# EAGLE board relay_wired_panalized (EAGLE 7.7.0)
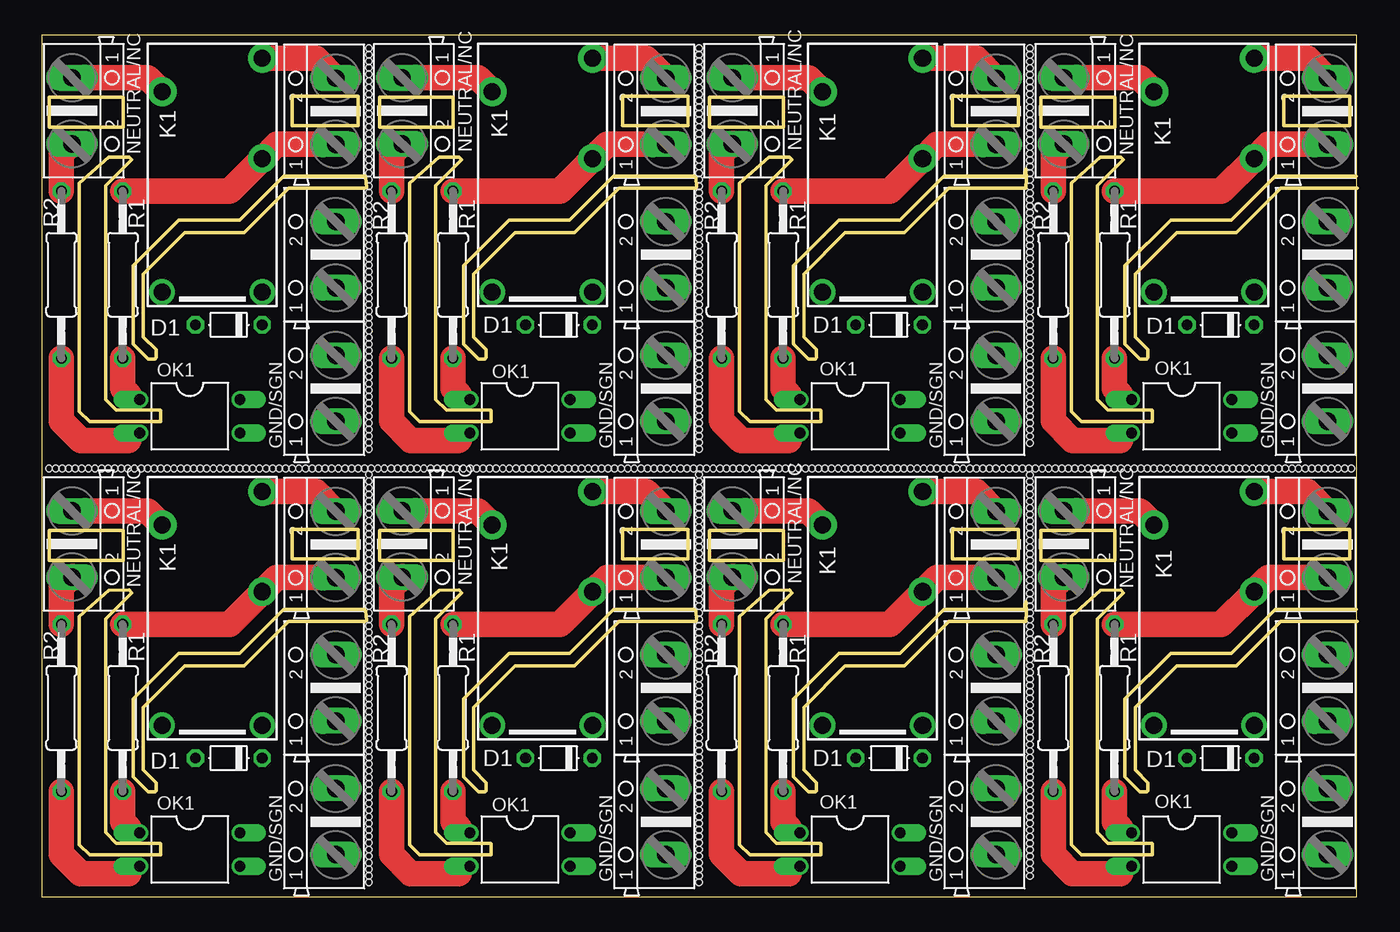
[diagram p0: board, top side]
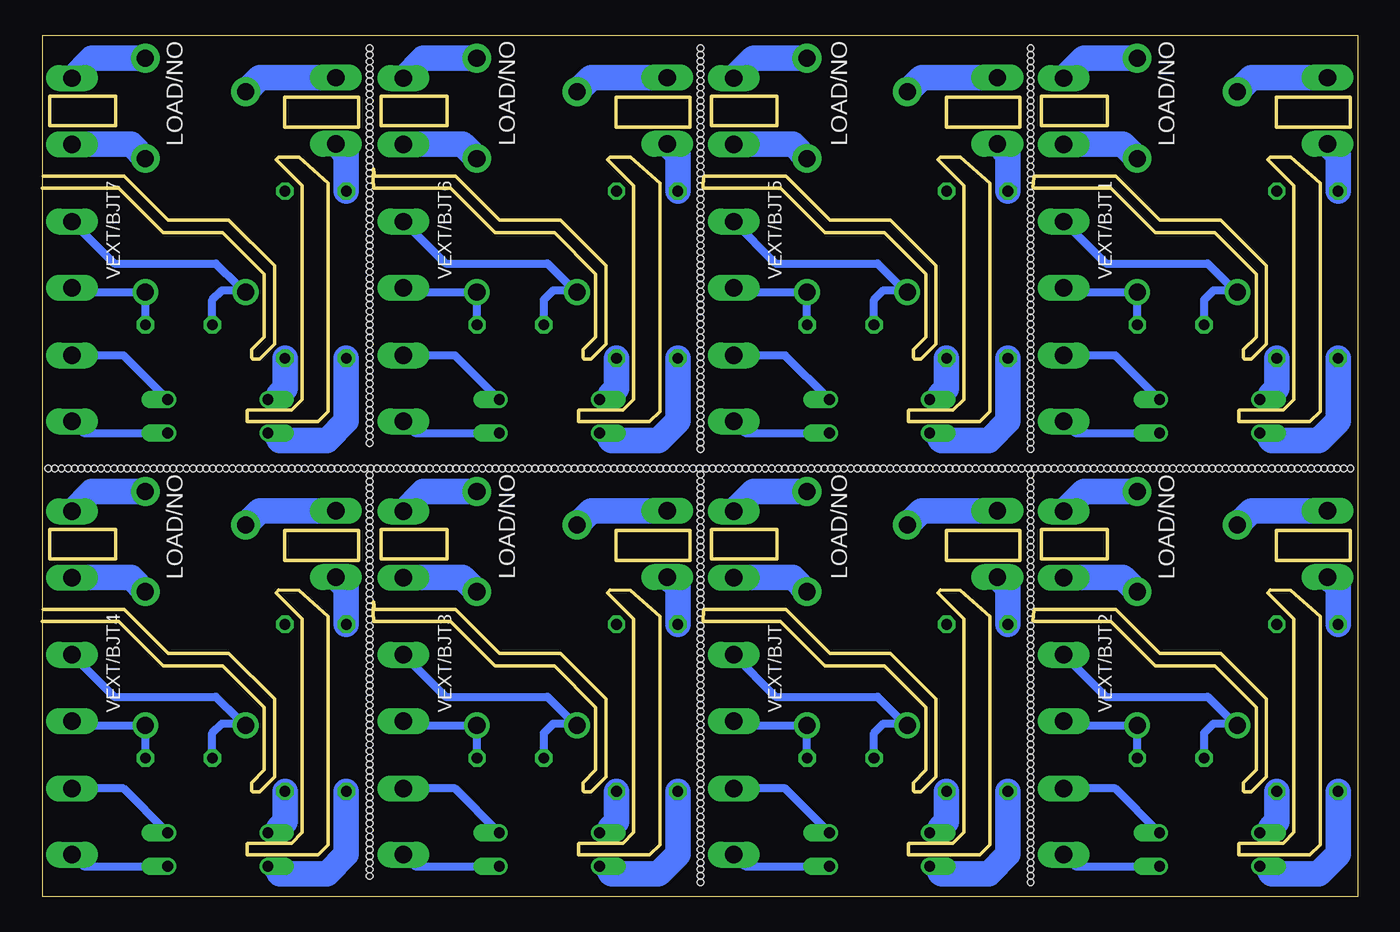
[diagram p1: board, bottom side, seen from below]

Size 100.01 x 65.5 mm. Coordinates in mm from the lower left corner, seen from the top.
Outline: 24.55,21.85 24.54,21.85
Outline: 24.54,21.85 18.39,21.85 15.04,18.5 10.43,18.5 6.97,15.04 6.97,9.1 8.11,7.96 8.62,7.96 8.7,8.04 8.7,8.67 7.74,9.63 7.74,14.4 10.89,17.55 15.41,17.55 18.79,20.93 24.61,20.93 24.69,21.01 24.65,21.74 24.54,21.85
Outline: 49.65,21.85 49.64,21.85
Outline: 49.64,21.85 43.49,21.85 40.14,18.5 35.53,18.5 32.07,15.04 32.07,9.1 33.21,7.96 33.72,7.96 33.8,8.04 33.8,8.67 32.84,9.63 32.84,14.4 35.99,17.55 40.51,17.55 43.89,20.93 49.71,20.93 49.79,21.01 49.75,21.74 49.64,21.85
Outline: 74.75,21.85 74.74,21.85
Outline: 74.74,21.85 68.59,21.85 65.24,18.5 60.63,18.5 57.17,15.04 57.17,9.1 58.31,7.96 58.82,7.96 58.9,8.04 58.9,8.67 57.94,9.63 57.94,14.4 61.09,17.55 65.61,17.55 68.99,20.93 74.81,20.93 74.87,21.67 74.83,22.4 74.74,21.85
Outline: 99.94,21.85 93.79,21.85 90.44,18.5 85.83,18.5 82.37,15.04 82.37,9.1 83.51,7.96 84.02,7.96 84.1,8.04 84.1,8.67 83.14,9.63 83.14,14.4 86.29,17.55 90.81,17.55 94.19,20.93 100.01,20.93
Outline: 24.55,54.79 24.54,54.79
Outline: 24.54,54.79 18.39,54.79 15.04,51.44 10.43,51.44 6.97,47.98 6.97,42.04 8.11,40.9 8.62,40.9 8.7,40.98 8.7,41.61 7.74,42.57 7.74,47.34 10.89,50.49 15.41,50.49 18.79,53.87 24.61,53.87 24.69,53.95 24.65,54.68 24.54,54.79
Outline: 49.65,54.79 49.64,54.79
Outline: 49.64,54.79 43.49,54.79 40.14,51.44 35.53,51.44 32.07,47.98 32.07,42.04 33.21,40.9 33.72,40.9 33.8,40.98 33.8,41.61 32.84,42.57 32.84,47.34 35.99,50.49 40.51,50.49 43.89,53.87 49.71,53.87 49.79,53.95 49.75,54.68 49.64,54.79
Outline: 74.75,54.79 74.74,54.79
Outline: 74.74,54.79 68.59,54.79 65.24,51.44 60.63,51.44 57.17,47.98 57.17,42.04 58.31,40.9 58.82,40.9 58.9,40.98 58.9,41.61 57.94,42.57 57.94,47.34 61.09,50.49 65.61,50.49 68.99,53.87 74.81,53.87 74.87,54.61 74.83,55.34 74.74,54.79
Outline: 99.94,54.79 93.79,54.79 90.44,51.44 85.83,51.44 82.37,47.98 82.37,42.04 83.51,40.9 84.02,40.9 84.1,40.98 84.1,41.61 83.14,42.57 83.14,47.34 86.29,50.49 90.81,50.49 94.19,53.87 100.01,53.87
Outline: 0,0 100,0 100,65.5 0,65.5 0,0
Outline: 0.58,27.86 0.58,25.58 6.2,25.57 6.2,27.85 0.58,27.86
Outline: 5.1,23.29 2.87,21.31 2.87,3.96 3.65,3.18 9.06,3.18 9.06,4.04 9.02,4.08 5.67,4.08 4.87,4.88 4.87,21.14 6.84,23.11 6.65,23.31 5.1,23.29
Outline: 19.05,27.91 24.05,27.91 24.05,25.68 19.05,25.68 19.05,27.91
Outline: 25.68,27.86 25.68,25.58 31.3,25.57 31.3,27.85 25.68,27.86
Outline: 30.2,23.29 27.97,21.31 27.97,3.96 28.75,3.18 34.16,3.18 34.16,4.04 34.12,4.08 30.77,4.08 29.97,4.88 29.97,21.14 31.94,23.11 31.75,23.31 30.2,23.29
Outline: 44.15,27.91 49.15,27.91 49.15,25.68 44.15,25.68 44.15,27.91
Outline: 50.78,27.86 50.78,25.58 56.4,25.57 56.4,27.85 50.78,27.86
Outline: 55.3,23.29 53.07,21.31 53.07,3.96 53.85,3.18 59.26,3.18 59.26,4.04 59.22,4.08 55.87,4.08 55.07,4.88 55.07,21.14 57.04,23.11 56.85,23.31 55.3,23.29
Outline: 69.25,27.91 74.25,27.91 74.25,25.68 69.25,25.68 69.25,27.91
Outline: 75.98,27.86 75.98,25.58 81.6,25.57 81.6,27.85 75.98,27.86
Outline: 80.5,23.29 78.27,21.31 78.27,3.96 79.05,3.18 84.46,3.18 84.46,4.04 84.42,4.08 81.07,4.08 80.27,4.88 80.27,21.14 82.24,23.11 82.05,23.31 80.5,23.29
Outline: 94.45,27.91 99.45,27.91 99.45,25.68 94.45,25.68 94.45,27.91
Outline: 0.58,60.8 0.58,58.52 6.2,58.51 6.2,60.79 0.58,60.8
Outline: 5.1,56.23 2.87,54.25 2.87,36.9 3.65,36.12 9.06,36.12 9.06,36.98 9.02,37.02 5.67,37.02 4.87,37.82 4.87,54.08 6.84,56.05 6.65,56.25 5.1,56.23
Outline: 19.05,60.85 24.05,60.85 24.05,58.62 19.05,58.62 19.05,60.85
Outline: 25.68,60.8 25.68,58.52 31.3,58.51 31.3,60.79 25.68,60.8
Outline: 30.2,56.23 27.97,54.25 27.97,36.9 28.75,36.12 34.16,36.12 34.16,36.98 34.12,37.02 30.77,37.02 29.97,37.82 29.97,54.08 31.94,56.05 31.75,56.25 30.2,56.23
Outline: 44.15,60.85 49.15,60.85 49.15,58.62 44.15,58.62 44.15,60.85
Outline: 50.78,60.8 50.78,58.52 56.4,58.51 56.4,60.79 50.78,60.8
Outline: 55.3,56.23 53.07,54.25 53.07,36.9 53.85,36.12 59.26,36.12 59.26,36.98 59.22,37.02 55.87,37.02 55.07,37.82 55.07,54.08 57.04,56.05 56.85,56.25 55.3,56.23
Outline: 69.25,60.85 74.25,60.85 74.25,58.62 69.25,58.62 69.25,60.85
Outline: 75.98,60.8 75.98,58.52 81.6,58.51 81.6,60.79 75.98,60.8
Outline: 80.5,56.23 78.27,54.25 78.27,36.9 79.05,36.12 84.46,36.12 84.46,36.98 84.42,37.02 81.07,37.02 80.27,37.82 80.27,54.08 82.24,56.05 82.05,56.25 80.5,56.23
Outline: 94.45,60.85 99.45,60.85 99.45,58.62 94.45,58.62 94.45,60.85
Copper layers (1*16): Top 0.035mm / dielectric 1.5mm / Bottom 0.035mm
Design rules "default": minimum track width 10mil, minimum drill 24mil, track to track 8mil, track to pad 8mil, pad to pad 8mil, via to via 8mil, smd to smd 8mil, copper to edge 40mil, drill to drill 8mil, minimum pad ring 10mil, minimum via ring 8mil, stop-mask expansion 4mil, vias tented up to drill 0mil, thermal gap 10mil
Holes 0.5 mm at 73.56,32.56 73.06,32.56 72.56,32.56 27.06,32.56 72.06,32.56 71.56,32.56 71.06,32.56 61.06,32.56 61.56,32.56 62.06,32.56 62.56,32.56 63.06,32.56 63.56,32.56 64.06,32.56 64.56,32.56 65.06,32.56 65.56,32.56 66.06,32.56 66.56,32.56 67.06,32.56 67.56,32.56 68.06,32.56 68.56,32.56 69.06,32.56 69.56,32.56 70.06,32.56 70.56,32.56 51.06,32.56 51.56,32.56 52.06,32.56 52.56,32.56 53.06,32.56 53.56,32.56 54.06,32.56 54.56,32.56 55.06,32.56 55.56,32.56 56.06,32.56 56.56,32.56 57.06,32.56 57.56,32.56 58.06,32.56 58.56,32.56 59.06,32.56 59.56,32.56 60.06,32.56 60.56,32.56 41.06,32.56 41.56,32.56 42.06,32.56 42.56,32.56 43.06,32.56 43.56,32.56 44.06,32.56 44.56,32.56 45.06,32.56 45.56,32.56 46.06,32.56 46.56,32.56 47.06,32.56 47.56,32.56 48.06,32.56 48.56,32.56 49.06,32.56 49.56,32.56 50.06,32.56 50.56,32.56 31.06,32.56 31.56,32.56 32.06,32.56 32.56,32.56 33.06,32.56 33.56,32.56 34.06,32.56 34.56,32.56 35.06,32.56 35.56,32.56 36.06,32.56 36.56,32.56 37.06,32.56 37.56,32.56 38.06,32.56 38.56,32.56 39.06,32.56 39.56,32.56 40.06,32.56 40.56,32.56 30.56,32.56 30.06,32.56 29.56,32.56 29.06,32.56 28.56,32.56 28.06,32.56 27.56,32.56 26.56,32.56 26.06,32.56 25.56,32.56 25.06,32.56 24.56,32.56 24.06,32.56 23.56,32.56 23.06,32.56 22.56,32.56 24.88,16.09 49.99,29.09 75.14,30.07 75.14,29.57 75.14,29.07 75.14,28.57 75.14,28.07 75.14,27.57 75.14,27.07 75.14,26.57 75.14,26.07 75.14,25.57 75.14,25.07 75.14,24.57 75.14,24.07 75.14,23.57 75.14,23.07 75.14,22.57 75.14,22.07 75.14,21.57 75.14,21.07 75.14,20.57 75.14,20.07 75.14,19.57 75.14,19.07 75.14,18.57 75.14,18.07 75.14,17.57 75.14,17.07 75.14,16.57 75.14,16.07 75.14,15.57 75.14,15.07 75.14,14.57 75.14,14.07 75.14,13.57 75.14,13.07 75.14,12.57 75.14,12.07 75.14,11.57 75.14,30.57 75.14,31.07 75.14,31.57 75.14,32.07 74.06,32.56 74.56,32.56 75.06,32.56 75.56,32.56 76.56,32.56 76.06,32.56 77.06,32.56 77.56,32.56 78.06,32.56 78.56,32.56 79.56,32.56 79.06,32.56 80.06,32.56 80.56,32.56 81.06,32.56 81.56,32.56 82.56,32.56 82.06,32.56 83.06,32.56 83.56,32.56 84.06,32.56 84.56,32.56 85.56,32.56 85.06,32.56 86.06,32.56 86.56,32.56 87.06,32.56 87.56,32.56 88.56,32.56 88.06,32.56 89.06,32.56 89.56,32.56 90.06,32.56 90.56,32.56 91.56,32.56 91.06,32.56 92.06,32.56 92.56,32.56 93.06,32.56 93.56,32.56 94.56,32.56 94.06,32.56 95.06,32.56 95.56,32.56 96.06,32.56 96.56,32.56 97.56,32.56 97.06,32.56 98.06,32.56 98.56,32.56 99.06,32.56 99.56,32.56 75.14,10.57 75.14,11.07 75.14,10.07 75.14,9.57 75.14,9.07 75.14,8.57 75.14,7.57 75.14,8.07 75.14,7.07 75.14,6.57 75.14,6.07 75.14,5.57 75.14,4.57 75.14,5.07 75.14,4.07 75.14,3.57 75.14,3.07 75.14,2.57 75.14,1.57 75.14,2.07 49.99,28.59 49.99,28.09 49.99,27.59 49.99,27.09 49.99,26.59 49.99,26.09 49.99,25.59 49.99,25.09 49.99,24.59 49.99,24.09 49.99,23.59 49.99,23.09 49.99,22.59 49.99,22.09 49.99,21.59 49.99,21.09 49.99,20.59 49.99,20.09 49.99,19.59 49.99,19.09 49.99,18.59 49.99,18.09 49.99,17.59 49.99,17.09 49.99,16.59 49.99,16.09 49.99,15.59 49.99,15.09 49.99,14.59 49.99,14.09 49.99,13.59 49.99,13.09 49.99,12.59 49.99,12.09 49.99,11.59 49.99,11.09 49.99,10.59 49.99,10.09 49.99,9.59 49.99,9.09 49.99,8.59 49.99,8.09 49.99,7.59 49.99,7.09 49.99,6.59 49.99,6.09 49.99,5.59 49.99,5.09 49.99,4.59 49.99,4.09 49.99,3.59 49.99,3.09 49.99,2.59 49.99,2.09 49.99,1.59 49.99,1.09 49.99,29.59 49.99,30.09 49.99,30.59 49.99,31.09 49.99,31.59 49.99,32.09 24.88,29.09 24.88,28.59 24.88,28.09 24.88,27.59 24.88,27.09 24.88,26.59 24.88,26.09 24.88,25.59 24.88,25.09 24.88,24.59 24.88,24.09 24.88,23.59 24.88,23.09 24.88,22.59 24.88,22.09 24.88,21.59 24.88,21.09 24.88,20.59 24.88,20.09 24.88,19.59 24.88,19.09 24.88,18.59 24.88,18.09 24.88,17.59 24.88,17.09 24.88,16.59 24.88,29.59 24.88,30.09 24.88,30.59 24.88,31.09 24.88,31.59 24.88,32.09 24.88,12.59 24.88,12.09 24.88,11.59 24.88,11.09 24.88,10.59 24.88,10.09 24.88,9.59 24.88,9.09 24.88,8.59 24.88,8.09 24.88,7.59 24.88,7.09 24.88,6.59 24.88,6.09 24.88,5.59 24.88,5.09 24.88,4.59 24.88,4.09 24.88,3.59 24.88,3.09 24.88,2.59 24.88,2.09 24.88,1.59 24.88,1.09 24.88,13.09 24.88,13.59 24.88,14.09 24.88,14.59 24.88,15.09 24.88,15.59 18.06,32.56 14.06,32.56 13.56,32.56 13.06,32.56 12.56,32.56 12.06,32.56 11.56,32.56 11.06,32.56 10.56,32.56 10.06,32.56 9.56,32.56 9.06,32.56 8.56,32.56 8.06,32.56 7.56,32.56 7.06,32.56 6.56,32.56 14.56,32.56 15.06,32.56 15.56,32.56 16.06,32.56 16.56,32.56 17.06,32.56 17.56,32.56 18.56,32.56 19.06,32.56 19.56,32.56 20.06,32.56 20.56,32.56 21.06,32.56 21.56,32.56 22.06,32.56 6.06,32.56 5.56,32.56 5.06,32.56 4.56,32.56 4.06,32.56 3.56,32.56 3.06,32.56 2.56,32.56 2.06,32.56 1.56,32.56 1.06,32.56 0.56,32.56 24.88,49.03 49.99,62.03 75.14,63.01 75.14,62.51 75.14,62.01 75.14,61.51 75.14,61.01 75.14,60.51 75.14,60.01 75.14,59.51 75.14,59.01 75.14,58.51 75.14,58.01 75.14,57.51 75.14,57.01 75.14,56.51 75.14,56.01 75.14,55.51 75.14,55.01 75.14,54.51 75.14,54.01 75.14,53.51 75.14,53.01 75.14,52.51 75.14,52.01 75.14,51.51 75.14,51.01 75.14,50.51 75.14,50.01 75.14,49.51 75.14,49.01 75.14,48.51 75.14,48.01 75.14,47.51 75.14,47.01 75.14,46.51 75.14,46.01 75.14,45.51 75.14,45.01 75.14,44.51 75.14,63.51 75.14,64.01 75.14,64.51 75.14,43.51 75.14,44.01 75.14,43.01 75.14,42.51 75.14,42.01 75.14,41.51 75.14,40.51 75.14,41.01 75.14,40.01 75.14,39.51 75.14,39.01 75.14,38.51 75.14,37.51 75.14,38.01 75.14,37.01 75.14,36.51 75.14,36.01 75.14,35.51 75.14,34.51 75.14,35.01 49.99,61.53 49.99,61.03 49.99,60.53 49.99,60.03 49.99,59.53 49.99,59.03 49.99,58.53 49.99,58.03 49.99,57.53 49.99,57.03 49.99,56.53 49.99,56.03 49.99,55.53 49.99,55.03 49.99,54.53 49.99,54.03 49.99,53.53 49.99,53.03 49.99,52.53 49.99,52.03 49.99,51.53 49.99,51.03 49.99,50.53 49.99,50.03 49.99,49.53 49.99,49.03 49.99,48.53 49.99,48.03 49.99,47.53 49.99,47.03 49.99,46.53 49.99,46.03 49.99,45.53 49.99,45.03 49.99,44.53 49.99,44.03 49.99,43.53 49.99,43.03 49.99,42.53 49.99,42.03 49.99,41.53 49.99,41.03 49.99,40.53 49.99,40.03 49.99,39.53 49.99,39.03 49.99,38.53 49.99,38.03 49.99,37.53 49.99,37.03 49.99,36.53 49.99,36.03 49.99,35.53 49.99,35.03 49.99,34.53 49.99,34.03 49.99,62.53 49.99,63.03 49.99,63.53 49.99,64.03 49.99,64.53 24.88,62.03 24.88,61.53 24.88,61.03 24.88,60.53 24.88,60.03 24.88,59.53 24.88,59.03 24.88,58.53 24.88,58.03 24.88,57.53 24.88,57.03 24.88,56.53 24.88,56.03 24.88,55.53 24.88,55.03 24.88,54.53 24.88,54.03 24.88,53.53 24.88,53.03 24.88,52.53 24.88,52.03 24.88,51.53 24.88,51.03 24.88,50.53 24.88,50.03 24.88,49.53 24.88,62.53 24.88,63.03 24.88,63.53 24.88,64.03 24.88,64.53 24.88,45.53 24.88,45.03 24.88,44.53 24.88,44.03 24.88,43.53 24.88,43.03 24.88,42.53 24.88,42.03 24.88,41.53 24.88,41.03 24.88,40.53 24.88,40.03 24.88,39.53 24.88,39.03 24.88,38.53 24.88,38.03 24.88,37.53 24.88,37.03 24.88,36.53 24.88,36.03 24.88,35.53 24.88,35.03 24.88,34.53 24.88,34.03 24.88,46.03 24.88,46.53 24.88,47.03 24.88,47.53 24.88,48.03 24.88,48.53

## Footprints (pad centres in the part's own frame; a part is rotated, then mirrored left to right if it is on the bottom)
D-5 = drill 0.813 octagon: A 2.54,0; C -2.54,0
AK500/2 = drill 1.321 long: 1 -2.515,0; 2 2.515,0
G5SB = drill 1.3 pad 1.93: 1 7.62,3.81; 5 7.62,-3.81 | drill 1.3 pad 2.184: 2 -2.54,3.81; 3 -10.16,3.81; 4 -7.62,-3.81
DIL04 = drill 0.813 offset: 1 -1.27,-3.81; 2 1.27,-3.81; 3 1.27,3.81; 4 -1.27,3.81
0207/12 = drill 0.813 octagon: 1 -6.35,0; 2 6.35,0

## Placement (x,y rotation side)
D1  1N4007  [D-5]  39.33,10.54 180 top
D2  1N4007  [D-5]  64.43,10.54 180 top
D3  1N4007  [D-5]  14.23,10.54 180 top
D4  1N4007  [D-5]  89.63,10.54 180 top
D5  1N4007  [D-5]  14.23,43.48 180 top
D6  1N4007  [D-5]  39.33,43.48 180 top
D7  1N4007  [D-5]  64.43,43.48 180 top
D8  1N4007  [D-5]  89.63,43.48 180 top
GND/S1  [AK500/2]  47.46,5.71 90 top
GND/S2  [AK500/2]  22.36,5.71 90 top
GND/S3  [AK500/2]  72.56,5.71 90 top
GND/S4  [AK500/2]  97.76,5.71 90 top
GND/S5  [AK500/2]  22.36,38.65 90 top
GND/S6  [AK500/2]  47.46,38.65 90 top
GND/S7  [AK500/2]  72.56,38.65 90 top
GND/S8  [AK500/2]  97.76,38.65 90 top
K1  G5Q-1-EU DC12  [G5SB]  38.07,20.65 270 top
K2  G5Q-1-EU DC12  [G5SB]  63.17,20.65 270 top
K3  G5Q-1-EU DC12  [G5SB]  12.97,20.65 270 top
K4  G5Q-1-EU DC12  [G5SB]  88.37,20.65 270 top
K5  G5Q-1-EU DC12  [G5SB]  12.97,53.59 270 top
K6  G5Q-1-EU DC12  [G5SB]  38.07,53.59 270 top
K7  G5Q-1-EU DC12  [G5SB]  63.17,53.59 270 top
K8  G5Q-1-EU DC12  [G5SB]  88.37,53.59 270 top
LOAD/NO1  [AK500/2]  47.46,26.79 90 top
LOAD/NO2  [AK500/2]  22.36,26.79 90 top
LOAD/NO3  [AK500/2]  72.56,26.79 90 top
LOAD/NO4  [AK500/2]  97.76,26.79 90 top
LOAD/NO5  [AK500/2]  22.36,59.73 90 top
LOAD/NO6  [AK500/2]  47.46,59.73 90 top
LOAD/NO7  [AK500/2]  72.56,59.73 90 top
LOAD/NO8  [AK500/2]  97.76,59.73 90 top
NEUTRAL/NC  [AK500/2]  52.51,26.82 270 top
NEUTRAL/NC1  [AK500/2]  27.41,26.82 270 top
NEUTRAL/NC2  [AK500/2]  2.31,26.82 270 top
NEUTRAL/NC3  [AK500/2]  2.31,59.76 270 top
NEUTRAL/NC4  [AK500/2]  77.71,26.82 270 top
NEUTRAL/NC5  [AK500/2]  27.41,59.76 270 top
NEUTRAL/NC6  [AK500/2]  52.51,59.76 270 top
NEUTRAL/NC7  [AK500/2]  77.71,59.76 270 top
OK1  SFH620A  [DIL04]  36.37,3.59 270 top
OK2  SFH620A  [DIL04]  61.47,3.59 270 top
OK3  SFH620A  [DIL04]  11.27,3.59 270 top
OK4  SFH620A  [DIL04]  86.67,3.59 270 top
OK5  SFH620A  [DIL04]  11.27,36.53 270 top
OK6  SFH620A  [DIL04]  36.37,36.53 270 top
OK7  SFH620A  [DIL04]  61.47,36.53 270 top
OK8  SFH620A  [DIL04]  86.67,36.53 270 top
R1  22k/2W  [0207/12]  31.27,14.36 270 top
R2  22k/2W  [0207/12]  26.6,14.36 270 top
R3  22k/2W  [0207/12]  56.37,14.36 270 top
R4  22k/2W  [0207/12]  51.7,14.36 270 top
R5  22k/2W  [0207/12]  6.17,14.36 270 top
R6  22k/2W  [0207/12]  1.5,14.36 270 top
R7  22k/2W  [0207/12]  81.56,14.36 270 top
R8  22k/2W  [0207/12]  76.9,14.36 270 top
R9  22k/2W  [0207/12]  6.17,47.3 270 top
R10  22k/2W  [0207/12]  1.5,47.3 270 top
R11  22k/2W  [0207/12]  31.27,47.3 270 top
R12  22k/2W  [0207/12]  26.6,47.3 270 top
R13  22k/2W  [0207/12]  56.37,47.3 270 top
R14  22k/2W  [0207/12]  51.7,47.3 270 top
R15  22k/2W  [0207/12]  81.56,47.3 270 top
R16  22k/2W  [0207/12]  76.9,47.3 270 top
VEXT/BJT  [AK500/2]  47.46,15.88 90 top
VEXT/BJT1  [AK500/2]  22.36,48.82 90 top
VEXT/BJT2  [AK500/2]  22.36,15.88 90 top
VEXT/BJT3  [AK500/2]  72.56,15.88 90 top
VEXT/BJT4  [AK500/2]  97.76,15.88 90 top
VEXT/BJT5  [AK500/2]  47.46,48.82 90 top
VEXT/BJT6  [AK500/2]  72.56,48.82 90 top
VEXT/BJT7  [AK500/2]  97.76,48.82 90 top

## Library data of the parts
D1-D8 = diode
GND/S1-GND/S8 LOAD/NO1-LOAD/NO8 NEUTRAL/NC NEUTRAL/NC1-NEUTRAL/NC7 VEXT/BJT VEXT/BJT1-VEXT/BJT7 = con-ptr500-modified; OC_FARNELL: unknown; OC_NEWARK: unknown
K1-K8 = relay; OC_FARNELL: unknown; OC_NEWARK: unknown
OK1-OK8 = optocoupler; MPN: SFH620A-2; OC_FARNELL: 1469594; OC_NEWARK: 97K9546
R1-R16 = rcl

## Nets
N$1: K5.2 LOAD/NO5.1 R9.1
N$2: NEUTRAL/NC3.2 R10.1
N$3: K5.4 NEUTRAL/NC3.1
N$4: OK5.2 R10.2
N$5: K3.2 LOAD/NO2.1 R5.1
N$6: NEUTRAL/NC2.2 R6.1
N$7: K3.4 NEUTRAL/NC2.1
N$8: OK3.2 R6.2
N$9: OK5.1 R9.2
N$10: D5.C K5.1 VEXT/BJT1.1
N$11: D5.A K5.5 VEXT/BJT1.2
N$12: D3.C K3.1 VEXT/BJT2.1
N$13: K5.3 LOAD/NO5.2
N$14: GND/S5.2 OK5.4
N$15: GND/S5.1 OK5.3
N$16: K6.2 LOAD/NO6.1 R11.1
N$17: NEUTRAL/NC5.2 R12.1
N$18: K6.4 NEUTRAL/NC5.1
N$19: OK6.2 R12.2
N$20: OK6.1 R11.2
N$21: D6.C K6.1 VEXT/BJT5.1
N$22: D6.A K6.5 VEXT/BJT5.2
N$23: K6.3 LOAD/NO6.2
N$24: GND/S6.2 OK6.4
N$25: OK3.1 R5.2
N$26: GND/S6.1 OK6.3
N$27: K7.2 LOAD/NO7.1 R13.1
N$28: NEUTRAL/NC6.2 R14.1
N$29: K7.4 NEUTRAL/NC6.1
N$30: D3.A K3.5 VEXT/BJT2.2
N$31: K3.3 LOAD/NO2.2
N$32: GND/S2.2 OK3.4
N$33: GND/S2.1 OK3.3
N$34: K1.2 LOAD/NO1.1 R1.1
N$35: NEUTRAL/NC1.2 R2.1
N$36: K1.4 NEUTRAL/NC1.1
N$37: OK1.2 R2.2
N$38: OK1.1 R1.2
N$39: D1.C K1.1 VEXT/BJT.1
N$40: D1.A K1.5 VEXT/BJT.2
N$41: K1.3 LOAD/NO1.2
N$42: GND/S1.2 OK1.4
N$43: GND/S1.1 OK1.3
N$44: K2.2 LOAD/NO3.1 R3.1
N$45: NEUTRAL/NC.2 R4.1
N$46: K2.4 NEUTRAL/NC.1
N$47: OK2.2 R4.2
N$48: OK2.1 R3.2
N$49: D2.C K2.1 VEXT/BJT3.1
N$50: D2.A K2.5 VEXT/BJT3.2
N$51: K2.3 LOAD/NO3.2
N$52: GND/S3.2 OK2.4
N$53: GND/S3.1 OK2.3
N$54: K4.2 LOAD/NO4.1 R7.1
N$55: NEUTRAL/NC4.2 R8.1
N$56: K4.4 NEUTRAL/NC4.1
N$57: OK4.2 R8.2
N$58: OK4.1 R7.2
N$59: D4.C K4.1 VEXT/BJT4.1
N$60: D4.A K4.5 VEXT/BJT4.2
N$61: K4.3 LOAD/NO4.2
N$62: GND/S4.2 OK4.4
N$63: GND/S4.1 OK4.3
N$64: OK7.2 R14.2
N$65: OK7.1 R13.2
N$66: D7.C K7.1 VEXT/BJT6.1
N$67: D7.A K7.5 VEXT/BJT6.2
N$68: K7.3 LOAD/NO7.2
N$69: GND/S7.2 OK7.4
N$70: GND/S7.1 OK7.3
N$71: K8.2 LOAD/NO8.1 R15.1
N$72: NEUTRAL/NC7.2 R16.1
N$73: K8.4 NEUTRAL/NC7.1
N$74: OK8.2 R16.2
N$75: OK8.1 R15.2
N$76: D8.C K8.1 VEXT/BJT7.1
N$77: D8.A K8.5 VEXT/BJT7.2
N$78: K8.3 LOAD/NO8.2
N$79: GND/S8.2 OK8.4
N$80: GND/S8.1 OK8.3

## Tracks (layer width: path | path; a pad name or v marks a point on that pad's centre or on a via)
N$1
  Top 1.93: LOAD/NO5.1 17.87,57.21 16.91,56.25 | R9.1 14.3,53.65 K5.2
  Bottom 1.93: LOAD/NO5.1 17.86,57.21 K5.2
N$2
  Top 1.93: R10.1 1.5,56.44 2.36,57.3
  Bottom 1.93: R10.1 1.5,56.44 NEUTRAL/NC3.2
N$3
  Top 1.93: NEUTRAL/NC3.1 8.08,62.28 9.11,61.25
  Bottom 1.93: NEUTRAL/NC3.1 8.1,62.28 K5.4
N$4
  Top 1.016: 6.66,34.75 6.86,34.75 7.36,35.25
  Top 1.93: R10.2 1.5,36.16 2.96,34.7 6.61,34.7 6.66,34.75
  Bottom 1.27: 6.66,34.8 7,34.8 OK5.2
  Bottom 1.93: R10.2 1.5,36.16 2.96,34.7 6.56,34.7 6.66,34.8
N$5
  Top 1.93: LOAD/NO2.1 17.87,24.27 16.91,23.31 | R5.1 14.3,20.71 K3.2
  Bottom 1.93: LOAD/NO2.1 17.86,24.27 K3.2
N$6
  Top 1.93: R6.1 1.5,23.5 2.36,24.36
  Bottom 1.93: R6.1 1.5,23.5 NEUTRAL/NC2.2
N$7
  Top 1.93: NEUTRAL/NC2.1 8.08,29.34 9.11,28.31
  Bottom 1.93: NEUTRAL/NC2.1 8.1,29.34 K3.4
N$8
  Top 1.016: 6.66,1.81 6.86,1.81 7.36,2.31
  Top 1.93: R6.2 1.5,3.22 2.96,1.76 6.61,1.76 6.66,1.81
  Bottom 1.27: 6.66,1.86 7,1.86 OK3.2
  Bottom 1.93: R6.2 1.5,3.22 2.96,1.76 6.56,1.76 6.66,1.86
N$9
  Top 0.61: 6.66,38.15 7.11,38.15 OK5.1
  Top 1.93: R9.2 6.17,38.65 6.66,38.15
  Bottom 0.61: 6.66,38.15 7.11,38.15 OK5.1
  Bottom 1.93: R9.2 6.17,38.65 6.66,38.15
N$10
  Bottom 0.61: VEXT/BJT1.1 22.03,45.97 K5.1 16.77,45.96 D5.C
N$11
  Bottom 0.61: VEXT/BJT1.2 22.34,51.33 19.16,48.15 11.42,48.15 9.74,46.47 9.74,46.12 | D5.A 11.69,45.39 10.96,46.12 9.74,46.12 | 9.74,46.12 9.31,46.12 K5.5
N$12
  Bottom 0.61: VEXT/BJT2.1 22.03,13.03 K3.1 16.77,13.02 D3.C
N$13
  Top 1.93: K5.3 20.86,63.75 LOAD/NO5.2
  Bottom 1.93: K5.3 20.85,63.75 LOAD/NO5.2
N$14
  Bottom 0.61: OK5.4 18.44,41.17 GND/S5.2
N$15
  Bottom 0.61: GND/S5.1 21.48,35.26 OK5.3
N$16
  Top 1.93: LOAD/NO6.1 42.97,57.21 42.01,56.25 | R11.1 39.4,53.65 K6.2
  Bottom 1.93: LOAD/NO6.1 42.96,57.21 K6.2
N$17
  Top 1.93: R12.1 26.6,56.44 27.46,57.3
  Bottom 1.93: R12.1 26.6,56.44 NEUTRAL/NC5.2
N$18
  Top 1.93: NEUTRAL/NC5.1 33.18,62.28 34.21,61.25
  Bottom 1.93: NEUTRAL/NC5.1 33.2,62.28 K6.4
N$19
  Top 1.016: 31.76,34.75 31.96,34.75 32.46,35.25
  Top 1.93: R12.2 26.6,36.16 28.06,34.7 31.71,34.7 31.76,34.75
  Bottom 1.27: 31.76,34.8 32.1,34.8 OK6.2
  Bottom 1.93: R12.2 26.6,36.16 28.06,34.7 31.66,34.7 31.76,34.8
N$20
  Top 0.61: 31.76,38.15 32.21,38.15 OK6.1
  Top 1.93: R11.2 31.27,38.65 31.76,38.15
  Bottom 0.61: 31.76,38.15 32.21,38.15 OK6.1
  Bottom 1.93: R11.2 31.27,38.65 31.76,38.15
N$21
  Bottom 0.61: VEXT/BJT5.1 47.13,45.97 K6.1 41.87,45.96 D6.C
N$22
  Bottom 0.61: VEXT/BJT5.2 47.44,51.33 44.26,48.15 36.52,48.15 34.84,46.47 34.84,46.12 | D6.A 36.79,45.39 36.06,46.12 34.84,46.12 | 34.84,46.12 34.41,46.12 K6.5
N$23
  Top 1.93: K6.3 45.96,63.75 LOAD/NO6.2
  Bottom 1.93: K6.3 45.95,63.75 LOAD/NO6.2
N$24
  Bottom 0.61: OK6.4 43.54,41.17 GND/S6.2
N$25
  Top 0.61: 6.66,5.21 7.11,5.21 OK3.1
  Top 1.93: R5.2 6.17,5.71 6.66,5.21
  Bottom 0.61: 6.66,5.21 7.11,5.21 OK3.1
  Bottom 1.93: R5.2 6.17,5.71 6.66,5.21
N$26
  Bottom 0.61: GND/S6.1 46.58,35.26 OK6.3
N$27
  Top 1.93: LOAD/NO7.1 68.07,57.21 67.11,56.25 | R13.1 64.5,53.65 K7.2
  Bottom 1.93: LOAD/NO7.1 68.06,57.21 K7.2
N$28
  Top 1.93: R14.1 51.7,56.44 52.56,57.3
  Bottom 1.93: R14.1 51.7,56.44 NEUTRAL/NC6.2
N$29
  Top 1.93: NEUTRAL/NC6.1 58.28,62.28 59.31,61.25
  Bottom 1.93: NEUTRAL/NC6.1 58.3,62.28 K7.4
N$30
  Bottom 0.61: VEXT/BJT2.2 22.34,18.39 19.16,15.21 11.42,15.21 9.74,13.53 9.74,13.18 | D3.A 11.69,12.45 10.96,13.18 9.74,13.18 | 9.74,13.18 9.31,13.18 K3.5
N$31
  Top 1.93: K3.3 20.86,30.81 LOAD/NO2.2
  Bottom 1.93: K3.3 20.85,30.81 LOAD/NO2.2
N$32
  Bottom 0.61: OK3.4 18.44,8.23 GND/S2.2
N$33
  Bottom 0.61: GND/S2.1 21.48,2.32 OK3.3
N$34
  Top 1.93: LOAD/NO1.1 42.97,24.27 42.01,23.31 | R1.1 39.4,20.71 K1.2
  Bottom 1.93: LOAD/NO1.1 42.96,24.27 K1.2
N$35
  Top 1.93: R2.1 26.6,23.5 27.46,24.36
  Bottom 1.93: R2.1 26.6,23.5 NEUTRAL/NC1.2
N$36
  Top 1.93: NEUTRAL/NC1.1 33.18,29.34 34.21,28.31
  Bottom 1.93: NEUTRAL/NC1.1 33.2,29.34 K1.4
N$37
  Top 1.016: 31.76,1.81 31.96,1.81 32.46,2.31
  Top 1.93: R2.2 26.6,3.22 28.06,1.76 31.71,1.76 31.76,1.81
  Bottom 1.27: 31.76,1.86 32.1,1.86 OK1.2
  Bottom 1.93: R2.2 26.6,3.22 28.06,1.76 31.66,1.76 31.76,1.86
N$38
  Top 0.61: 31.76,5.21 32.21,5.21 OK1.1
  Top 1.93: R1.2 31.27,5.71 31.76,5.21
  Bottom 0.61: 31.76,5.21 32.21,5.21 OK1.1
  Bottom 1.93: R1.2 31.27,5.71 31.76,5.21
N$39
  Bottom 0.61: VEXT/BJT.1 47.13,13.03 K1.1 41.87,13.02 D1.C
N$40
  Bottom 0.61: VEXT/BJT.2 47.44,18.39 44.26,15.21 36.52,15.21 34.84,13.53 34.84,13.18 | D1.A 36.79,12.45 36.06,13.18 34.84,13.18 | 34.84,13.18 34.41,13.18 K1.5
N$41
  Top 1.93: K1.3 45.96,30.81 LOAD/NO1.2
  Bottom 1.93: K1.3 45.95,30.81 LOAD/NO1.2
N$42
  Bottom 0.61: OK1.4 43.54,8.23 GND/S1.2
N$43
  Bottom 0.61: GND/S1.1 46.58,2.32 OK1.3
N$44
  Top 1.93: LOAD/NO3.1 68.07,24.27 67.11,23.31 | R3.1 64.5,20.71 K2.2
  Bottom 1.93: LOAD/NO3.1 68.06,24.27 K2.2
N$45
  Top 1.93: R4.1 51.7,23.5 52.56,24.36
  Bottom 1.93: R4.1 51.7,23.5 NEUTRAL/NC.2
N$46
  Top 1.93: NEUTRAL/NC.1 58.28,29.34 59.31,28.31
  Bottom 1.93: NEUTRAL/NC.1 58.3,29.34 K2.4
N$47
  Top 1.016: 56.86,1.81 57.06,1.81 57.56,2.31
  Top 1.93: R4.2 51.7,3.22 53.16,1.76 56.81,1.76 56.86,1.81
  Bottom 1.27: 56.86,1.86 57.2,1.86 OK2.2
  Bottom 1.93: R4.2 51.7,3.22 53.16,1.76 56.76,1.76 56.86,1.86
N$48
  Top 0.61: 56.86,5.21 57.31,5.21 OK2.1
  Top 1.93: R3.2 56.37,5.71 56.86,5.21
  Bottom 0.61: 56.86,5.21 57.31,5.21 OK2.1
  Bottom 1.93: R3.2 56.37,5.71 56.86,5.21
N$49
  Bottom 0.61: VEXT/BJT3.1 72.23,13.03 K2.1 66.97,13.02 D2.C
N$50
  Bottom 0.61: VEXT/BJT3.2 72.54,18.39 69.36,15.21 61.62,15.21 59.94,13.53 59.94,13.18 | D2.A 61.89,12.45 61.16,13.18 59.94,13.18 | 59.94,13.18 59.51,13.18 K2.5
N$51
  Top 1.93: K2.3 71.06,30.81 LOAD/NO3.2
  Bottom 1.93: K2.3 71.05,30.81 LOAD/NO3.2
N$52
  Bottom 0.61: OK2.4 68.64,8.23 GND/S3.2
N$53
  Bottom 0.61: GND/S3.1 71.68,2.32 OK2.3
N$54
  Top 1.93: LOAD/NO4.1 93.27,24.27 92.31,23.31 | R7.1 89.7,20.71 K4.2
  Bottom 1.93: LOAD/NO4.1 93.26,24.27 K4.2
N$55
  Top 1.93: R8.1 76.9,23.5 77.76,24.36
  Bottom 1.93: R8.1 76.9,23.5 NEUTRAL/NC4.2
N$56
  Top 1.93: NEUTRAL/NC4.1 83.48,29.34 84.51,28.31
  Bottom 1.93: NEUTRAL/NC4.1 83.5,29.34 K4.4
N$57
  Top 1.016: 82.06,1.81 82.26,1.81 82.76,2.31
  Top 1.93: R8.2 76.9,3.22 78.36,1.76 82.01,1.76 82.06,1.81
  Bottom 1.27: 82.06,1.86 82.4,1.86 OK4.2
  Bottom 1.93: R8.2 76.9,3.22 78.36,1.76 81.96,1.76 82.06,1.86
N$58
  Top 0.61: 82.06,5.21 82.51,5.21 OK4.1
  Top 1.93: R7.2 81.56,5.71 82.06,5.21
  Bottom 0.61: 82.06,5.21 82.51,5.21 OK4.1
  Bottom 1.93: R7.2 81.56,5.71 82.06,5.21
N$59
  Bottom 0.61: VEXT/BJT4.1 97.43,13.03 K4.1 92.17,13.02 D4.C
N$60
  Bottom 0.61: VEXT/BJT4.2 97.74,18.39 94.56,15.21 86.82,15.21 85.14,13.53 85.14,13.18 | D4.A 87.09,12.45 86.36,13.18 85.14,13.18 | 85.14,13.18 84.71,13.18 K4.5
N$61
  Top 1.93: K4.3 96.26,30.81 LOAD/NO4.2
  Bottom 1.93: K4.3 96.25,30.81 LOAD/NO4.2
N$62
  Bottom 0.61: OK4.4 93.84,8.23 GND/S4.2
N$63
  Bottom 0.61: GND/S4.1 96.88,2.32 OK4.3
N$64
  Top 1.016: 56.86,34.75 57.06,34.75 57.56,35.25
  Top 1.93: R14.2 51.7,36.16 53.16,34.7 56.81,34.7 56.86,34.75
  Bottom 1.27: 56.86,34.8 57.2,34.8 OK7.2
  Bottom 1.93: R14.2 51.7,36.16 53.16,34.7 56.76,34.7 56.86,34.8
N$65
  Top 0.61: 56.86,38.15 57.31,38.15 OK7.1
  Top 1.93: R13.2 56.37,38.65 56.86,38.15
  Bottom 0.61: 56.86,38.15 57.31,38.15 OK7.1
  Bottom 1.93: R13.2 56.37,38.65 56.86,38.15
N$66
  Bottom 0.61: VEXT/BJT6.1 72.23,45.97 K7.1 66.97,45.96 D7.C
N$67
  Bottom 0.61: VEXT/BJT6.2 72.54,51.33 69.36,48.15 61.62,48.15 59.94,46.47 59.94,46.12 | D7.A 61.89,45.39 61.16,46.12 59.94,46.12 | 59.94,46.12 59.51,46.12 K7.5
N$68
  Top 1.93: K7.3 71.06,63.75 LOAD/NO7.2
  Bottom 1.93: K7.3 71.05,63.75 LOAD/NO7.2
N$69
  Bottom 0.61: OK7.4 68.64,41.17 GND/S7.2
N$70
  Bottom 0.61: GND/S7.1 71.68,35.26 OK7.3
N$71
  Top 1.93: LOAD/NO8.1 93.27,57.21 92.31,56.25 | R15.1 89.7,53.65 K8.2
  Bottom 1.93: LOAD/NO8.1 93.26,57.21 K8.2
N$72
  Top 1.93: R16.1 76.9,56.44 77.76,57.3
  Bottom 1.93: R16.1 76.9,56.44 NEUTRAL/NC7.2
N$73
  Top 1.93: NEUTRAL/NC7.1 83.48,62.28 84.51,61.25
  Bottom 1.93: NEUTRAL/NC7.1 83.5,62.28 K8.4
N$74
  Top 1.016: 82.06,34.75 82.26,34.75 82.76,35.25
  Top 1.93: R16.2 76.9,36.16 78.36,34.7 82.01,34.7 82.06,34.75
  Bottom 1.27: 82.06,34.8 82.4,34.8 OK8.2
  Bottom 1.93: R16.2 76.9,36.16 78.36,34.7 81.96,34.7 82.06,34.8
N$75
  Top 0.61: 82.06,38.15 82.51,38.15 OK8.1
  Top 1.93: R15.2 81.56,38.65 82.06,38.15
  Bottom 0.61: 82.06,38.15 82.51,38.15 OK8.1
  Bottom 1.93: R15.2 81.56,38.65 82.06,38.15
N$76
  Bottom 0.61: VEXT/BJT7.1 97.43,45.97 K8.1 92.17,45.96 D8.C
N$77
  Bottom 0.61: VEXT/BJT7.2 97.74,51.33 94.56,48.15 86.82,48.15 85.14,46.47 85.14,46.12 | D8.A 87.09,45.39 86.36,46.12 85.14,46.12 | 85.14,46.12 84.71,46.12 K8.5
N$78
  Top 1.93: K8.3 96.26,63.75 LOAD/NO8.2
  Bottom 1.93: K8.3 96.25,63.75 LOAD/NO8.2
N$79
  Bottom 0.61: OK8.4 93.84,41.17 GND/S8.2
N$80
  Bottom 0.61: GND/S8.1 96.88,35.26 OK8.3

## Text on the board
tNames: K1 | K1 | NEUTRAL/NC | NEUTRAL/NC | K1 | K1 | NEUTRAL/NC | NEUTRAL/NC | R2 | R1 | R2 | R1 | R2 | R1 | R2 | R1 | D1 | D1 | D1 | D1 | GND/SGN | GND/SGN | GND/SGN | GND/SGN | OK1 | OK1 | OK1 | OK1 | K1 | K1 | NEUTRAL/NC | NEUTRAL/NC | NEUTRAL/NC | K1 | K1 | NEUTRAL/NC | R2 | R1 | R2 | R1 | R2 | R1 | R2 | R1 | D1 | D1 | D1 | D1 | GND/SGN | GND/SGN | GND/SGN | GND/SGN | OK1 | OK1 | OK1 | OK1
bNames: LOAD/NO | LOAD/NO | LOAD/NO | LOAD/NO | LOAD/NO | LOAD/NO | LOAD/NO | LOAD/NO